# EAGLE board EXT_EXPANDER (EAGLE 6.5.0)
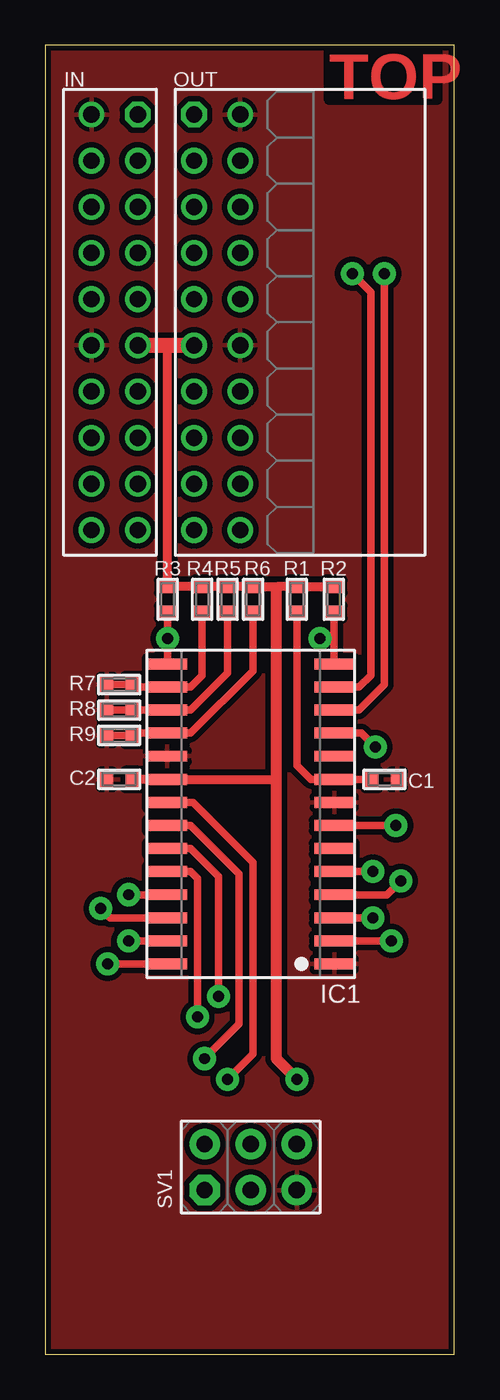
[diagram p0: board, top side]
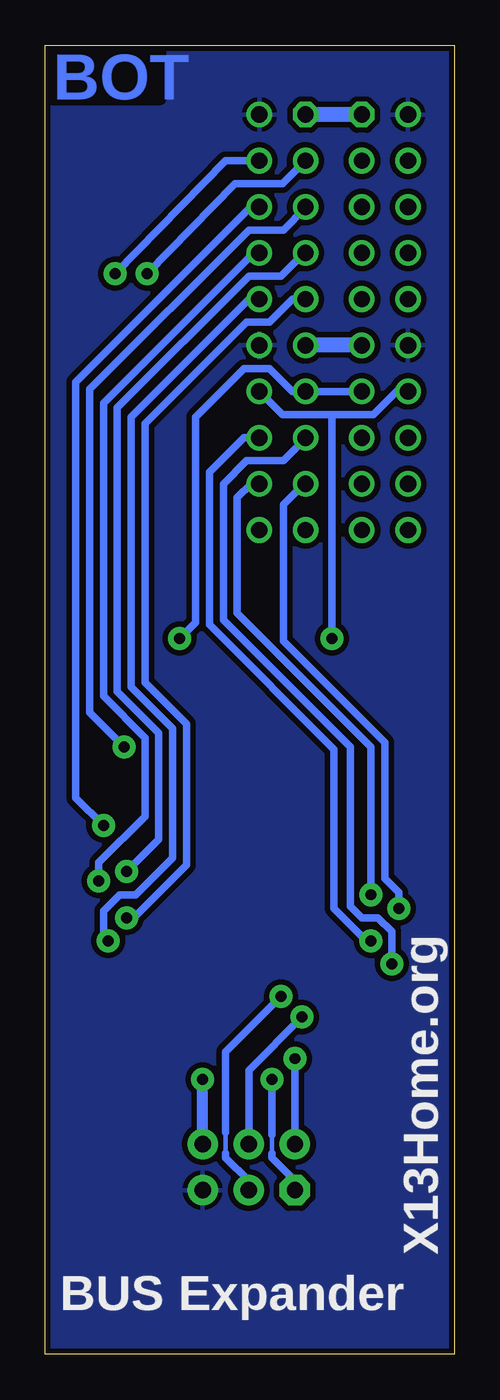
[diagram p1: board, bottom side, seen from below]

Size 22.5 x 72 mm. Coordinates in mm from the lower left corner, seen from the top.
Outline: 0,0 22.5,0 22.5,72 0,72 0,0
Copper layers (1*16): Top 0.035mm / dielectric 1.5mm / Bottom 0.035mm
Design rules "default *": minimum track width 10mil, minimum drill 10mil, track to track 12mil, track to pad 12mil, pad to pad 12mil, via to via 12mil, smd to smd 12mil, copper to edge 12mil, drill to drill 8mil, minimum pad ring 10mil, minimum via ring 8mil, stop-mask expansion 4mil, vias tented up to drill 0mil, thermal gap 10mil
tKeepout: area 0,0 to 22.5,2; area 0,70 to 22.5,72

## Footprints (pad centres in the part's own frame; a part is rotated, then mirrored left to right if it is on the bottom)
0603 = smd 0.7 x 0.9: 1 -0.697,0; 2 0.697,0
SOIC28 = smd 0.6 x 2.2: 1 -8.255,-4.6; 2 -6.985,-4.6; 3 -5.715,-4.6; 4 -4.445,-4.6; 5 -3.175,-4.6; 6 -1.905,-4.6; 7 -0.635,-4.6; 8 0.635,-4.6; 9 1.905,-4.6; 10 3.175,-4.6; 11 4.445,-4.6; 12 5.715,-4.6; 13 6.985,-4.6; 14 8.255,-4.6; 15 8.255,4.6; 16 6.985,4.6; 17 5.715,4.6; 18 4.445,4.6; 19 3.175,4.6; 20 1.905,4.6; 21 0.635,4.6; 22 -0.635,4.6; 23 -1.905,4.6; 24 -3.175,4.6; 25 -4.445,4.6; 26 -5.715,4.6; 27 -6.985,4.6; 28 -8.255,4.6
FE10-2WSS = drill 0.9 octagon: P$1 -11.43,1.27 | drill 0.9: P$2 -11.43,-1.27; P$3 -8.89,1.27; P$4 -8.89,-1.27; P$5 -6.35,1.27; P$6 -6.35,-1.27; P$7 -3.81,1.27; P$8 -3.81,-1.27; P$9 -1.27,1.27; P$10 -1.27,-1.27; P$11 1.27,1.27; P$12 1.27,-1.27; P$13 3.81,1.27; P$14 3.81,-1.27; P$15 6.35,1.27; P$16 6.35,-1.27; P$17 8.89,1.27; P$18 8.89,-1.27; P$19 11.43,1.27; P$20 11.43,-1.27
ML20LS = drill 0.9 octagon: P$1 -11.43,-1.27 | drill 0.9: P$2 -11.43,1.27; P$3 -8.89,-1.27; P$4 -8.89,1.27; P$5 -6.35,-1.27; P$6 -6.35,1.27; P$7 -3.81,-1.27; P$8 -3.81,1.27; P$9 -1.27,-1.27; P$10 -1.27,1.27; P$11 1.27,-1.27; P$12 1.27,1.27; P$13 3.81,-1.27; P$14 3.81,1.27; P$15 6.35,-1.27; P$16 6.35,1.27; P$17 8.89,-1.27; P$18 8.89,1.27; P$19 11.43,-1.27; P$20 11.43,1.27
ML6S = drill 0.9 pad 1.676 octagon: 1 -2.54,-1.27 | drill 0.9 pad 1.676: 2 -2.54,1.27; 3 0,-1.27; 4 0,1.27; 5 2.54,-1.27; 6 2.54,1.27

## Placement (x,y rotation side)
C1  33p  [0603]  18.67,31.62 180 top
C2  100n  [0603]  4.06,31.62 180 top
IC1  MCP23016-I/SO  [SOIC28]  11.3,29.72 90 top
IN  EF20  [FE10-2WSS]  3.81,56.77 270 top
OUT  MF20  [ML20LS]  9.45,56.77 270 top
R1  3k9  [0603]  13.84,41.53 90 top
R2  4k7  [0603]  15.88,41.53 90 top
R3  4k7  [0603]  6.73,41.53 270 top
R4  cfg  [0603]  8.64,41.53 270 top
R5  cfg  [0603]  10.03,41.53 270 top
R6  cfg  [0603]  11.43,41.53 270 top
R7  cfg  [0603]  4.06,36.83 180 top
R8  cfg  [0603]  4.06,35.43 180 top
R9  cfg  [0603]  4.06,34.04 180 top
SV1  [ML6S]  11.3,10.29 0 top

## Library data of the parts
C1 C2 R1-R9 = RCL
IC1 = ICs
IN OUT SV1 = Conn

## Nets
+3V3: C2.1 IC1.20 IN.P$11 OUT.P$11 R1.2 R2.2 R3.1 R4.1 R5.1 R6.1 SV1.6
GND: C1.1 C2.2 IC1.1 IC1.8 IC1.19 IN.P$2 IN.P$12 OUT.P$2 OUT.P$12 R7.2 R8.2 R9.2 SV1.5
N$1: C1.2 IC1.9 R1.1
N$2: IC1.7 OUT.P$6
N$3: IC1.5 OUT.P$7
N$4: IC1.4 OUT.P$8
N$5: IC1.3 OUT.P$9
N$6: IC1.2 OUT.P$10
N$7: IC1.11 OUT.P$5
N$8: IC1.12 OUT.P$4
N$9: IC1.13 OUT.P$3
N$10: IC1.16 R4.2 R7.1
N$11: IC1.17 R5.2 R8.1
N$12: IC1.18 R6.2 R9.1
N$13: IC1.21 SV1.1
N$14: IC1.22 SV1.2
N$15: IC1.23 SV1.3
N$16: IC1.24 SV1.4
N$17: IC1.25 OUT.P$18
N$18: IC1.26 OUT.P$17
N$19: IC1.27 OUT.P$16
N$20: IC1.28 OUT.P$15
PC4/SDA: IC1.15 IN.P$14 OUT.P$14 R3.2
PC5/SCL: IC1.14 IN.P$13 OUT.P$13 R2.1
VCC: IN.P$1 OUT.P$1

## Tracks (layer width: path | path; a pad name or v marks a point on that pad's centre or on a via)
+3V3  (via drill 0.6 pad 1.27)
  Top 0.406: 12.76,42.23 12.7,42.16
  Top 0.508: 6.73,55.5 R3.1 R4.1 R5.1 R6.1 12.76,42.23 R1.2 R2.2 | C2.1 IC1.20 12.7,31.62
  Top 0.61: 12.7,42.16 12.7,31.62 12.7,16.26 v13.84,15.11
  Top 0.813: IN.P$11 6.73,55.5 OUT.P$11
  Bottom 0.61: SV1.6 v13.84,15.11
  Bottom 0.813: IN.P$11 8.13,55.5
GND
  pour Bottom: 0,0.13 22.41,0.13 22.41,71.88 0,71.88
  pour Top: 0,0 22.41,0 22.41,71.88 0,71.88
N$1
  Top 0.406: R1.1 13.84,32.38 14.61,31.62 IC1.9 C1.2
N$2  (via drill 0.6 pad 1.27)
  Top 0.406: v19.3,29.08 IC1.7
  Bottom 0.406: OUT.P$6 11.18,63.12 20.83,53.47 20.83,30.61 v19.3,29.08
N$3  (via drill 0.6 pad 1.27)
  Top 0.406: v18.03,26.54 IC1.5
  Bottom 0.406: OUT.P$7 8.26,60.58 9.53,59.31 11.3,59.31 18.54,52.07 18.54,36.45 16.26,34.16 16.26,28.32 v18.03,26.54
N$4  (via drill 0.6 pad 1.27)
  Top 0.406: v19.56,26.04 18.8,25.27 IC1.4
  Bottom 0.406: OUT.P$8 11.05,60.58 19.3,52.32 19.3,36.2 17.02,33.91 17.02,29.59 19.56,27.05 v19.56,26.04
N$5  (via drill 0.6 pad 1.27)
  Top 0.406: IC1.3 v18.03,24
  Bottom 0.406: v18.03,24 17.65,24 14.73,26.92 14.73,34.67 17.02,36.96 17.02,51.18 11.43,56.77 10.16,56.77 8.89,58.04 OUT.P$9
N$6  (via drill 0.6 pad 1.27)
  Top 0.406: v19.05,22.73 IC1.2
  Bottom 0.406: OUT.P$10 11.3,58.04 17.78,51.56 17.78,36.7 15.49,34.42 15.49,27.3 17.53,25.27 18.41,25.27 19.3,24.38 19.3,22.99 v19.05,22.73
N$7  (via drill 0.6 pad 1.27)
  Top 0.406: v18.16,33.4 17.4,34.16 IC1.11
  Bottom 0.406: OUT.P$5 8.18,63.07 9.4,61.85 11.3,61.85 20.07,53.09 20.07,35.31 v18.16,33.4
N$8  (via drill 0.6 pad 1.27)
  Top 0.406: IC1.12 17.27,35.43 18.67,36.83 v18.67,59.44 18.67,59.56
  Bottom 0.406: OUT.P$4 12.57,65.66 v18.67,59.44
N$9  (via drill 0.6 pad 1.27)
  Top 0.406: IC1.13 17.27,36.7 17.91,37.34 17.91,58.42 v16.89,59.44
  Bottom 0.406: v16.89,59.44 12.06,64.39 9.45,64.39 OUT.P$3
N$10
  Top 0.406: R4.2 8.64,37.34 8,36.7 IC1.16 4.89,36.7 R7.1
N$11
  Top 0.406: R8.1 IC1.17 8,35.43 10.03,37.47 R5.2
N$12
  Top 0.406: R9.1 4.89,34.16 IC1.18 8,34.16 11.43,37.59 R6.2
N$13  (via drill 0.6 pad 1.27)
  Top 0.406: IC1.21 8.13,30.35 11.43,27.05 11.43,16.51 v10.03,15.11
  Bottom 0.254: 10.03,12.06 10.03,11.05
  Bottom 0.406: v10.03,15.11 10.03,12.06 | 10.03,11.05 10.03,10.79 8.76,9.53 SV1.1
N$14  (via drill 0.6 pad 1.27)
  Top 0.406: IC1.22 8,29.08 10.67,26.42 10.67,18.16 v8.76,16.26
  Bottom 0.406: v8.76,16.26 SV1.2
N$15  (via drill 0.6 pad 1.27)
  Top 0.406: IC1.23 8,27.81 9.53,26.29 v9.53,19.68
  Bottom 0.254: 12.57,12.19 12.57,11.05
  Bottom 0.406: 12.57,11.05 12.57,10.79 11.3,9.53 SV1.3 | 12.57,12.19 12.57,16.64 v9.53,19.68
N$16  (via drill 0.6 pad 1.27)
  Top 0.406: IC1.24 8,26.54 8.38,26.16 v8.38,18.54
  Bottom 0.406: SV1.4 11.3,15.62 v8.38,18.54
N$17  (via drill 0.6 pad 1.27)
  Top 0.406: v4.57,25.27 IC1.25
  Bottom 0.406: OUT.P$18 11.18,47.88 11.94,47.12 11.94,40.77 4.57,33.4 v4.57,25.27
N$18  (via drill 0.6 pad 1.27)
  Top 0.406: v3.05,24.51 3.56,24 IC1.26
  Bottom 0.406: OUT.P$17 8.26,47.88 9.4,46.74 9.4,39.24 3.81,33.66 3.81,26.16 3.05,25.4 v3.05,24.51
N$19  (via drill 0.6 pad 1.27)
  Top 0.406: v4.57,22.73 IC1.27
  Bottom 0.406: OUT.P$16 11.56,50.42 13.46,48.51 13.46,40.13 6.6,33.27 6.6,24.51 4.83,22.73 v4.57,22.73
N$20  (via drill 0.6 pad 1.27)
  Top 0.406: v3.43,21.46 IC1.28
  Bottom 0.406: OUT.P$15 8.18,50.37 9.4,49.15 11.43,49.15 12.7,47.88 12.7,40.39 5.71,33.4 5.71,24.64 5.08,24 4.19,24 3.43,23.24 v3.43,21.46
N$21
  Top 0.406: 4.7,36.83 3.43,36.83
N$22
  Top 0.406: 4.7,35.43 3.43,35.43
N$23
  Top 0.406: 4.7,34.04 3.43,34.04
PC4/SDA  (via drill 0.6 pad 1.27)
  Top 0.406: IC1.15 6.73,38 v6.73,39.37 R3.2
  Bottom 0.406: IN.P$14 3.17,52.96 4.45,51.69 6.73,51.69 | 6.73,51.69 9.45,51.69 OUT.P$14 | v6.73,39.37 6.73,51.69
PC5/SCL  (via drill 0.6 pad 1.27)
  Top 0.406: IC1.14 15.88,38 15.88,39.37 | 15.88,39.37 R2.1 | v15.11,39.37 15.88,39.37
  Bottom 0.406: IN.P$13 OUT.P$13 8.89,52.96 10.16,54.23 11.56,54.23 14.22,51.56 14.22,40.26 v15.11,39.37
VCC
  Bottom 0.813: IN.P$1 OUT.P$1

## Text on the board
Top: TOP
Bottom: BOT
bNames: X13Home.org | BUS Expander